# EAGLE board IOB-I2C-MAX731x_array (EAGLE 7.7.0)
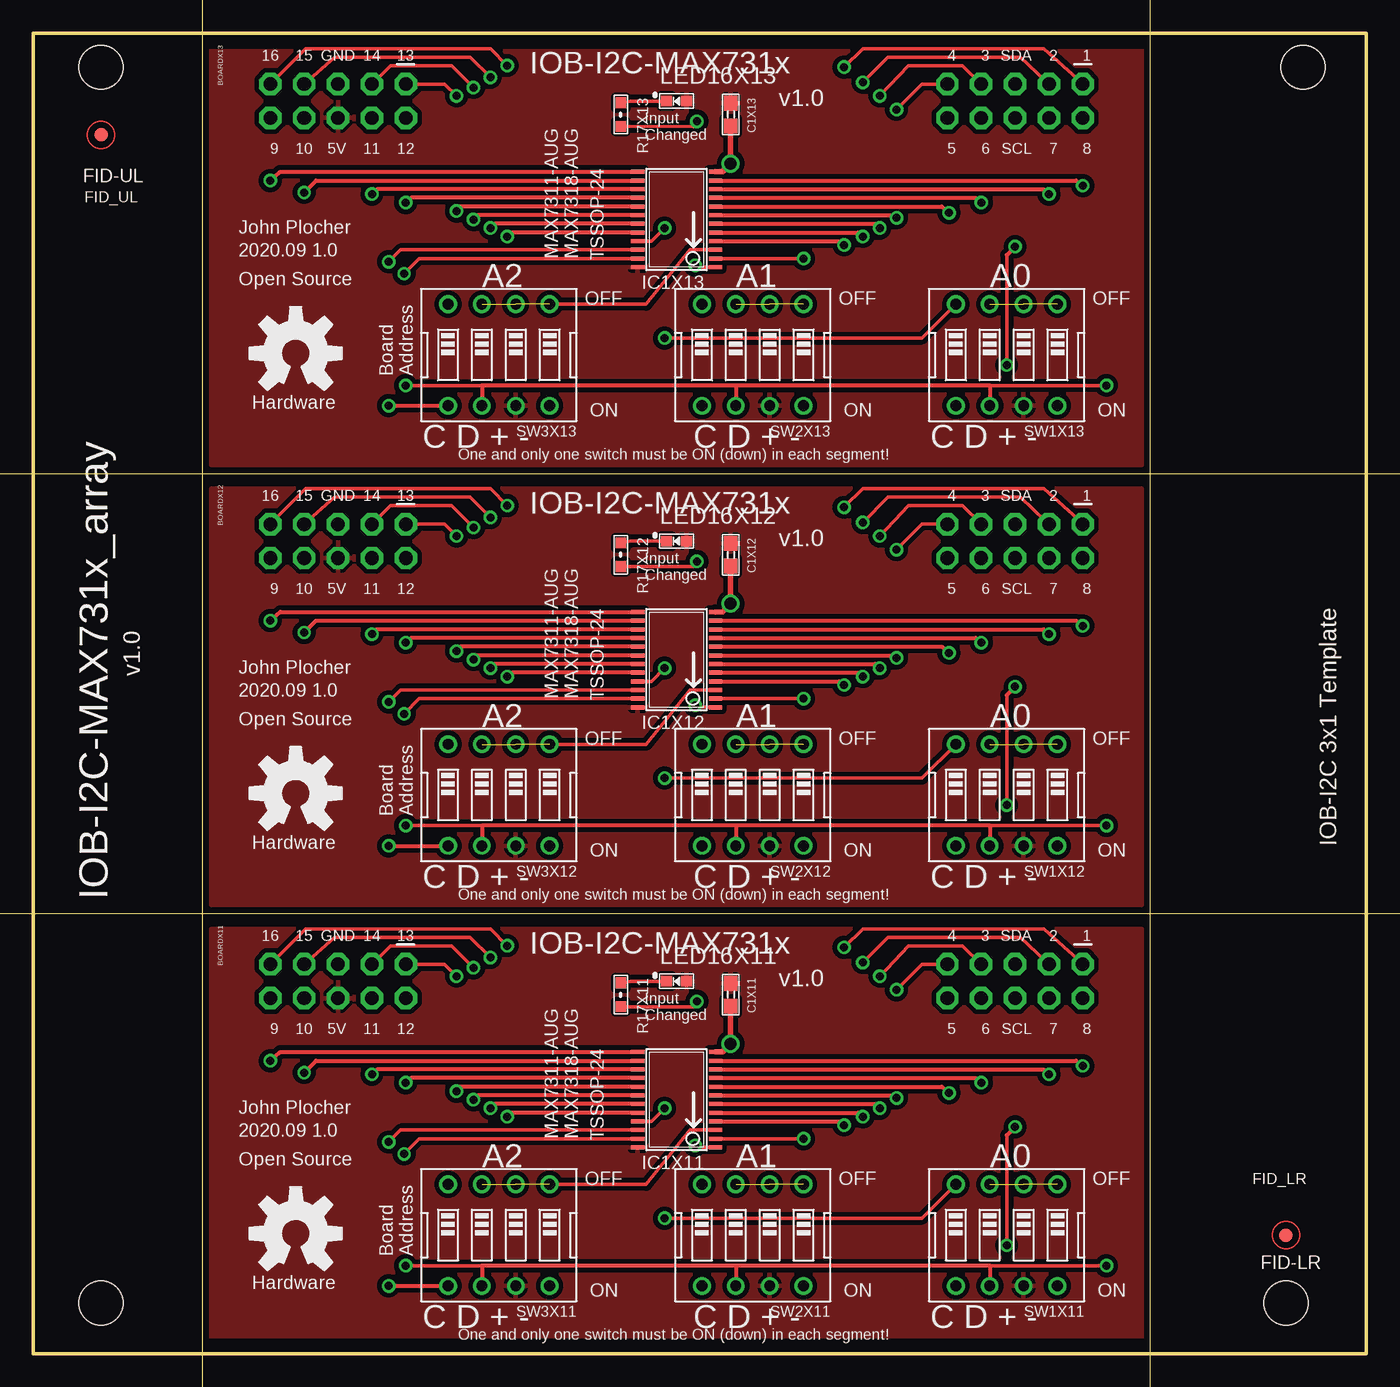
[diagram p0: board, top side]
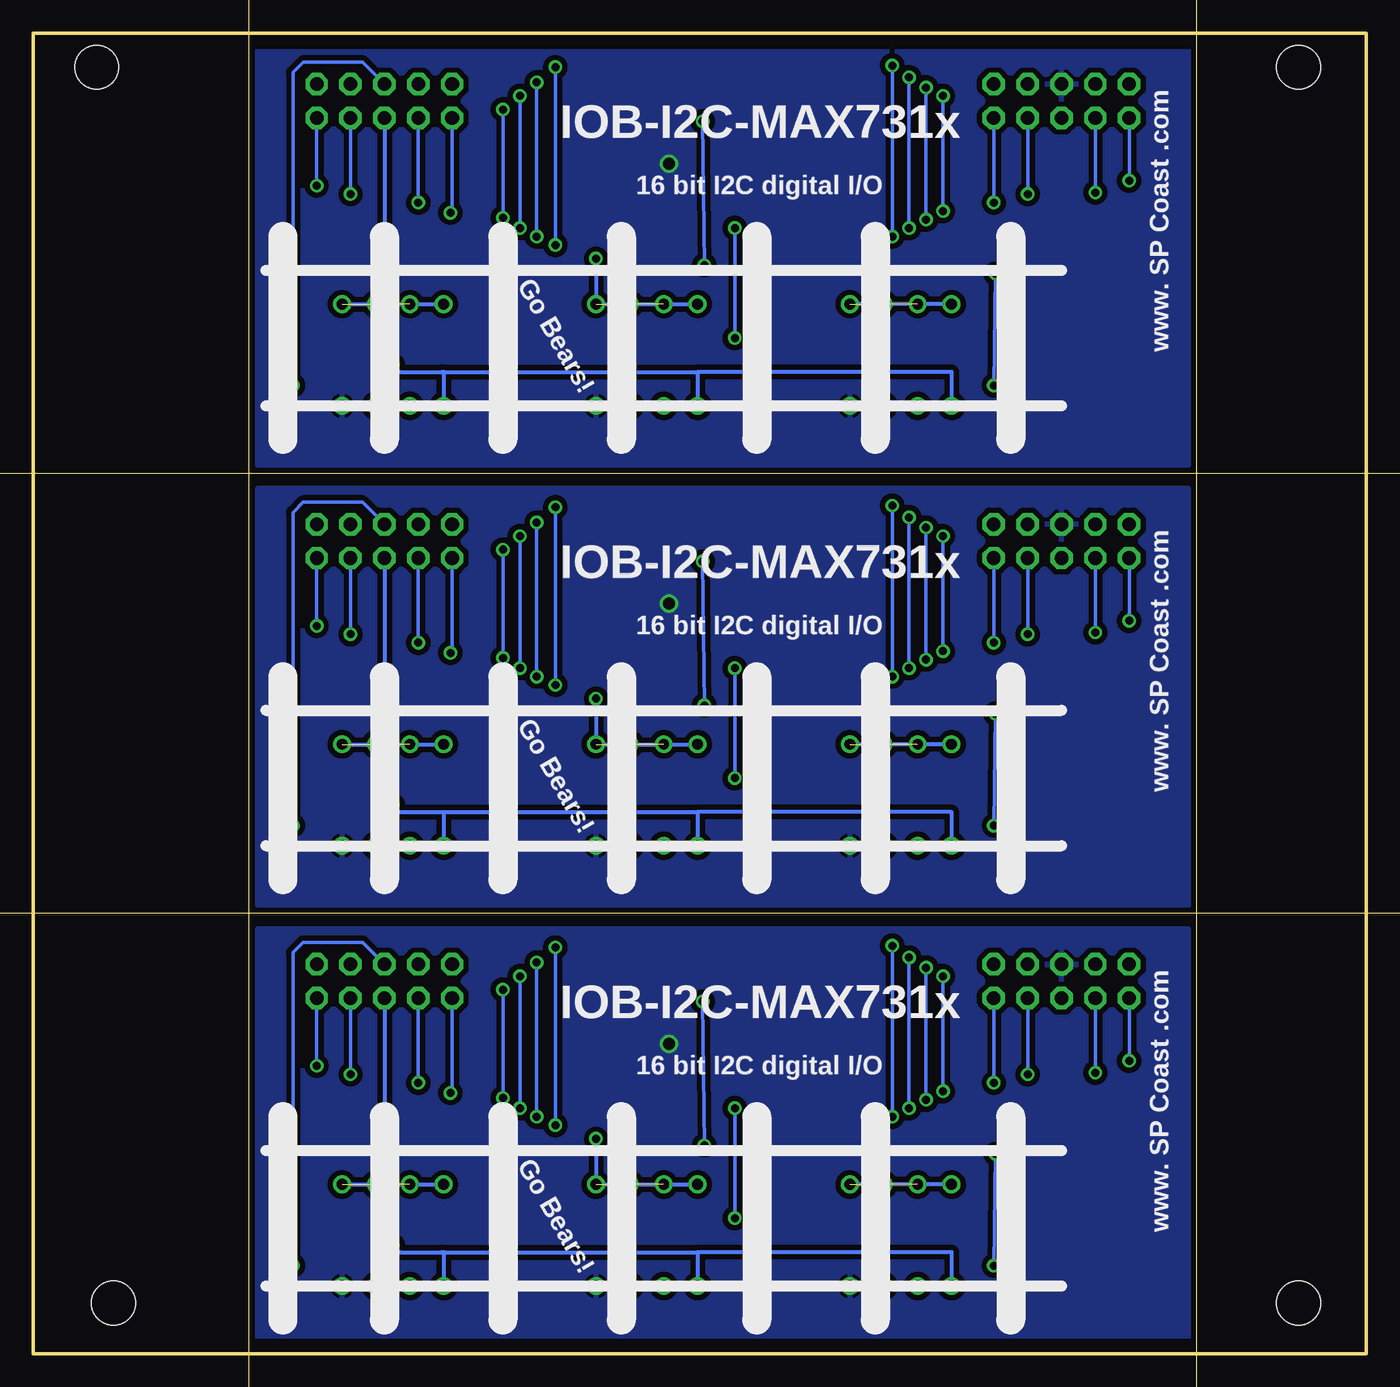
[diagram p1: board, bottom side, seen from below]

Size 100 x 99.06 mm. Coordinates in mm from the lower left corner, seen from the top.
Copper layers (1*16): Top 0.035mm / dielectric 1.5mm / Bottom 0.035mm
Design rules "default": minimum track width 10mil, minimum drill 0.6mm, track to track 8mil, track to pad 8mil, pad to pad 8mil, via to via 8mil, smd to smd 8mil, copper to edge 40mil, drill to drill 8mil, minimum pad ring 10mil, minimum via ring 8mil, stop-mask expansion 4mil, vias tented up to drill 0mil, thermal gap 10mil

## Footprints (pad centres in the part's own frame; a part is rotated, then mirrored left to right if it is on the bottom)
I2C-EXPANDER = drill 1.016 pad 1.676 octagon: 1 30.48,1.27; 2 27.94,1.27; 3 22.86,1.27; 4 20.32,1.27; 5 20.32,-1.27; 6 22.86,-1.27; 7 27.94,-1.27; 8 30.48,-1.27; 9 -30.48,-1.27; 10 -27.94,-1.27; 11 -22.86,-1.27; 12 -20.32,-1.27; 13 -20.32,1.27; 14 -22.86,1.27; 15 -27.94,1.27; 16 -30.48,1.27; GND -25.4,1.27; SCL 25.4,-1.27; SDA 25.4,1.27; VCC -25.4,-1.27
0603-CAP = smd 1.1 x 1: 1 -0.85,0; 2 0.85,0
FIDUCIAL_1MM = smd 1 x 1: 1 0,0
TSSOP24 = smd 0.305 x 0.991: 1 -3.575,-2.918; 2 -2.925,-2.918; 3 -2.275,-2.918; 4 -1.625,-2.918; 5 -0.975,-2.918; 6 -0.325,-2.918; 7 0.325,-2.918; 8 0.975,-2.918; 9 1.625,-2.918; 10 2.275,-2.918; 11 2.925,-2.918; 12 3.575,-2.918; 13 3.575,2.918; 14 2.925,2.918; 15 2.275,2.918; 16 1.625,2.918; 17 0.975,2.918; 18 0.325,2.918; 19 -0.325,2.918; 20 -0.975,2.918; 21 -1.625,2.918; 22 -2.275,2.918; 23 -2.925,2.918; 24 -3.575,2.918
0603-LED = smd 0.8 x 0.8: A 0.75,0; C -0.75,0
0603-RES = smd 0.813 x 0.813: 1 -0.889,0; 2 0.889,0
EDG-04 = drill 0.813: 1 -3.81,-3.81; 2 -1.27,-3.81; 3 1.27,-3.81; 4 3.81,-3.81; 5 3.81,3.81; 6 1.27,3.81; 7 -1.27,3.81; 8 -3.81,3.81
BOARD-TEMPLATE-IOB-I2C-3X1-ARRAY = hole 3.3: 5.08,96.52; 95.25,96.52; 93.98,3.81; 5.08,3.81

## Placement (x,y rotation side)
BOARDX11  CONNECTOR-I2C-EXPANDER  [I2C-EXPANDER]  48.26,27.94 0 top
BOARDX12  CONNECTOR-I2C-EXPANDER  [I2C-EXPANDER]  48.26,60.96 0 top
BOARDX13  CONNECTOR-I2C-EXPANDER  [I2C-EXPANDER]  48.26,93.98 0 top
C1X11  0.1uF  [0603-CAP]  52.32,26.92 270 top
C1X12  0.1uF  [0603-CAP]  52.32,59.94 270 top
C1X13  0.1uF  [0603-CAP]  52.32,92.96 270 top
FID-LR  FIDUCIAL  [FIDUCIAL_1MM]  93.98,8.89 0 top
FID-UL  FIDUCIAL  [FIDUCIAL_1MM]  5.08,91.44 0 top
IC1X11  MAX7311  [TSSOP24]  48.26,19.05 90 top
IC1X12  MAX7311  [TSSOP24]  48.26,52.07 90 top
IC1X13  MAX7311  [TSSOP24]  48.26,85.09 90 top
LED16X11  G  [0603-LED]  48.26,27.94 0 top
LED16X12  G  [0603-LED]  48.26,60.96 0 top
LED16X13  G  [0603-LED]  48.26,93.98 0 top
R17X11  4k7  [0603-RES]  44.07,26.92 270 top
R17X12  4k7  [0603-RES]  44.07,59.94 270 top
R17X13  4k7  [0603-RES]  44.07,92.96 270 top
SW1X11  SPSTx4  [EDG-04]  73.03,8.89 180 top
SW1X12  SPSTx4  [EDG-04]  73.03,41.91 180 top
SW1X13  SPSTx4  [EDG-04]  73.03,74.93 180 top
SW2X11  SPSTx4  [EDG-04]  53.98,8.89 180 top
SW2X12  SPSTx4  [EDG-04]  53.98,41.91 180 top
SW2X13  SPSTx4  [EDG-04]  53.98,74.93 180 top
SW3X11  SPSTx4  [EDG-04]  34.92,8.89 180 top
SW3X12  SPSTx4  [EDG-04]  34.92,41.91 180 top
SW3X13  SPSTx4  [EDG-04]  34.92,74.93 180 top
U$1X11  DOC-OSHW-LOGO-L  [OSHW-LOGO-L]  19.68,9.02 0 top
U$1X12  DOC-OSHW-LOGO-L  [OSHW-LOGO-L]  19.68,42.04 0 top
U$1X13  DOC-OSHW-LOGO-L  [OSHW-LOGO-L]  19.68,75.06 0 top
U$5X1  BOARD  [BOARD-TEMPLATE-IOB-I2C-3X1-ARRAY]  0,0 0 top

## Library data of the parts
BOARDX11-BOARDX13 C1X11-C1X13 FID-LR FID-UL IC1X11-IC1X13 LED16X11-LED16X13 R17X11-R17X13 SW1X11-SW1X13 SW2X11-SW2X13 SW3X11-SW3X13 U$1X11-U$1X13 U$5X1 = SPCoast

## Nets
!INTX11: IC1X11.1 R17X11.2
!INTX12: IC1X12.1 R17X12.2
!INTX13: IC1X13.1 R17X13.2
A0X11: IC1X11.21 SW1X11.1 SW1X11.2 SW1X11.3 SW1X11.4
A0X12: IC1X12.21 SW1X12.1 SW1X12.2 SW1X12.3 SW1X12.4
A0X13: IC1X13.21 SW1X13.1 SW1X13.2 SW1X13.3 SW1X13.4
A1X11: IC1X11.2 SW2X11.1 SW2X11.2 SW2X11.3 SW2X11.4
A1X12: IC1X12.2 SW2X12.1 SW2X12.2 SW2X12.3 SW2X12.4
A1X13: IC1X13.2 SW2X13.1 SW2X13.2 SW2X13.3 SW2X13.4
A2X11: IC1X11.3 SW3X11.1 SW3X11.2 SW3X11.3 SW3X11.4
A2X12: IC1X12.3 SW3X12.1 SW3X12.2 SW3X12.3 SW3X12.4
A2X13: IC1X13.3 SW3X13.1 SW3X13.2 SW3X13.3 SW3X13.4
GNDX11: BOARDX11.GND C1X11.2 IC1X11.12 SW1X11.8 SW2X11.8 SW3X11.8
GNDX12: BOARDX12.GND C1X12.2 IC1X12.12 SW1X12.8 SW2X12.8 SW3X12.8
GNDX13: BOARDX13.GND C1X13.2 IC1X13.12 SW1X13.8 SW2X13.8 SW3X13.8
N$38X11: LED16X11.C R17X11.1
N$38X12: LED16X12.C R17X12.1
N$38X13: LED16X13.C R17X13.1
P1X11: BOARDX11.1 IC1X11.4
P1X12: BOARDX12.1 IC1X12.4
P1X13: BOARDX13.1 IC1X13.4
P2X11: BOARDX11.2 IC1X11.5
P2X12: BOARDX12.2 IC1X12.5
P2X13: BOARDX13.2 IC1X13.5
P3X11: BOARDX11.3 IC1X11.6
P3X12: BOARDX12.3 IC1X12.6
P3X13: BOARDX13.3 IC1X13.6
P4X11: BOARDX11.4 IC1X11.7
P4X12: BOARDX12.4 IC1X12.7
P4X13: BOARDX13.4 IC1X13.7
P5X11: BOARDX11.5 IC1X11.8
P5X12: BOARDX12.5 IC1X12.8
P5X13: BOARDX13.5 IC1X13.8
P6X11: BOARDX11.6 IC1X11.9
P6X12: BOARDX12.6 IC1X12.9
P6X13: BOARDX13.6 IC1X13.9
P7X11: BOARDX11.7 IC1X11.10
P7X12: BOARDX12.7 IC1X12.10
P7X13: BOARDX13.7 IC1X13.10
P8X11: BOARDX11.8 IC1X11.11
P8X12: BOARDX12.8 IC1X12.11
P8X13: BOARDX13.8 IC1X13.11
P9X11: BOARDX11.9 IC1X11.13
P9X12: BOARDX12.9 IC1X12.13
P9X13: BOARDX13.9 IC1X13.13
P10X11: BOARDX11.10 IC1X11.14
P10X12: BOARDX12.10 IC1X12.14
P10X13: BOARDX13.10 IC1X13.14
P11X11: BOARDX11.11 IC1X11.15
P11X12: BOARDX12.11 IC1X12.15
P11X13: BOARDX13.11 IC1X13.15
P12X11: BOARDX11.12 IC1X11.16
P12X12: BOARDX12.12 IC1X12.16
P12X13: BOARDX13.12 IC1X13.16
P13X11: BOARDX11.13 IC1X11.17
P13X12: BOARDX12.13 IC1X12.17
P13X13: BOARDX13.13 IC1X13.17
P14X11: BOARDX11.14 IC1X11.18
P14X12: BOARDX12.14 IC1X12.18
P14X13: BOARDX13.14 IC1X13.18
P15X11: BOARDX11.15 IC1X11.19
P15X12: BOARDX12.15 IC1X12.19
P15X13: BOARDX13.15 IC1X13.19
P16X11: BOARDX11.16 IC1X11.20
P16X12: BOARDX12.16 IC1X12.20
P16X13: BOARDX13.16 IC1X13.20
SCLX11: BOARDX11.SCL IC1X11.22 SW1X11.5 SW2X11.5 SW3X11.5
SCLX12: BOARDX12.SCL IC1X12.22 SW1X12.5 SW2X12.5 SW3X12.5
SCLX13: BOARDX13.SCL IC1X13.22 SW1X13.5 SW2X13.5 SW3X13.5
SDAX11: BOARDX11.SDA IC1X11.23 SW1X11.6 SW2X11.6 SW3X11.6
SDAX12: BOARDX12.SDA IC1X12.23 SW1X12.6 SW2X12.6 SW3X12.6
SDAX13: BOARDX13.SDA IC1X13.23 SW1X13.6 SW2X13.6 SW3X13.6
VCCX11: BOARDX11.VCC C1X11.1 IC1X11.24 LED16X11.A SW1X11.7 SW2X11.7 SW3X11.7
VCCX12: BOARDX12.VCC C1X12.1 IC1X12.24 LED16X12.A SW1X12.7 SW2X12.7 SW3X12.7
VCCX13: BOARDX13.VCC C1X13.1 IC1X13.24 LED16X13.A SW1X13.7 SW2X13.7 SW3X13.7

## Tracks (layer width: path | path; a pad name or v marks a point on that pad's centre or on a via)
!INTX11  (via drill 0.6 pad 0.9)
  Top 0.254: v49.66,15.62 50.04,15.49 51.2,15.49 IC1X11.1 | R17X11.2 49.54,26.02 v49.78,26.42
  Bottom 0.254: v49.78,26.42 v49.66,15.62
!INTX12  (via drill 0.6 pad 0.9)
  Top 0.254: v49.66,48.64 50.04,48.51 51.2,48.51 IC1X12.1 | R17X12.2 49.54,59.04 v49.78,59.44
  Bottom 0.254: v49.78,59.44 v49.66,48.64
!INTX13  (via drill 0.6 pad 0.9)
  Top 0.254: v49.66,81.66 50.04,81.53 51.2,81.53 IC1X13.1 | R17X13.2 49.54,92.06 v49.78,92.46
  Bottom 0.254: v49.78,92.46 v49.66,81.66
A0X11  (via drill 0.6 pad 0.9)  (2 unrouted)
  Top 0.254: SW1X11.4 66.67,10.16 v47.37,10.16 | IC1X11.21 46.38,17.43 v47.37,18.41
  Bottom 0.254: v47.37,18.41 v47.37,10.16
  Bottom 0.305: SW1X11.1 SW1X11.4
A0X12  (via drill 0.6 pad 0.9)  (2 unrouted)
  Top 0.254: SW1X12.4 66.67,43.18 v47.37,43.18 | IC1X12.21 46.38,50.45 v47.37,51.44
  Bottom 0.254: v47.37,51.44 v47.37,43.18
  Bottom 0.305: SW1X12.1 SW1X12.4
A0X13  (via drill 0.6 pad 0.9)  (2 unrouted)
  Top 0.254: SW1X13.4 66.67,76.2 v47.37,76.2 | IC1X13.21 46.38,83.47 v47.37,84.45
  Bottom 0.254: v47.37,84.45 v47.37,76.2
  Bottom 0.305: SW1X13.1 SW1X13.4
A1X11  (via drill 0.6 pad 0.9)  (2 unrouted)
  Top 0.254: IC1X11.2 57.4,16.12 v57.78,16.12
  Top 0.305: 49.76,12.7 SW2X11.4
  Bottom 0.305: SW2X11.4 SW2X11.1 v57.78,16.12
A1X12  (via drill 0.6 pad 0.9)  (2 unrouted)
  Top 0.254: IC1X12.2 57.4,49.15 v57.78,49.14
  Top 0.305: 49.76,45.72 SW2X12.4
  Bottom 0.305: SW2X12.4 SW2X12.1 v57.78,49.14
A1X13  (via drill 0.6 pad 0.9)  (2 unrouted)
  Top 0.254: IC1X13.2 57.4,82.17 v57.78,82.16
  Top 0.305: 49.76,78.74 SW2X13.4
  Bottom 0.305: SW2X13.4 SW2X13.1 v57.78,82.16
A2X11  (2 unrouted)
  Top 0.254: IC1X11.3 49.29,16.77 45.97,12.7 SW3X11.1
  Bottom 0.305: SW3X11.4 SW3X11.1
A2X12  (2 unrouted)
  Top 0.254: IC1X12.3 49.29,49.8 45.97,45.72 SW3X12.1
  Bottom 0.305: SW3X12.4 SW3X12.1
A2X13  (2 unrouted)
  Top 0.254: IC1X13.3 49.29,82.81 45.97,78.74 SW3X13.1
  Bottom 0.305: SW3X13.4 SW3X13.1
GNDX11  (via drill 0.9 pad 1.35)
  Top 0.406: IC1X11.12 51.71,22.62 v52.32,23.24 C1X11.2
  pour Bottom (isolate 0.406, rank 2): 83.19,0.64 83.19,31.88 13.34,31.88 13.34,0.64
GNDX12  (via drill 0.9 pad 1.35)
  Top 0.406: IC1X12.12 51.71,55.65 v52.32,56.26 C1X12.2
  pour Bottom (isolate 0.406, rank 2): 83.19,33.66 83.19,64.9 13.34,64.9 13.34,33.66
GNDX13  (via drill 0.9 pad 1.35)
  Top 0.406: IC1X13.12 51.71,88.67 v52.32,89.28 C1X13.2
  pour Bottom (isolate 0.406, rank 2): 83.19,66.67 83.19,97.92 13.34,97.92 13.34,66.67
N$38X11
  Top 0.254: LED16X11.C 44.82,27.94 R17X11.1
N$38X12
  Top 0.254: LED16X12.C 44.82,60.96 R17X12.1
N$38X13
  Top 0.254: LED16X13.C 44.82,93.98 R17X13.1
P1X11  (via drill 0.6 pad 0.9)
  Top 0.254: v60.83,30.48 62.23,31.88 75.82,31.88 78.36,29.59 BOARDX11.1
  Top 0.305: IC1X11.4 60.48,17.43 v60.83,17.14
  Bottom 0.254: v60.83,17.14 v60.83,30.48
P1X12  (via drill 0.6 pad 0.9)
  Top 0.254: v60.83,63.5 62.23,64.9 75.82,64.9 78.36,62.61 BOARDX12.1
  Top 0.305: IC1X12.4 60.48,50.45 v60.83,50.16
  Bottom 0.254: v60.83,50.16 v60.83,63.5
P1X13  (via drill 0.6 pad 0.9)
  Top 0.254: v60.83,96.52 62.23,97.92 75.82,97.92 78.36,95.63 BOARDX13.1
  Top 0.305: IC1X13.4 60.48,83.47 v60.83,83.19
  Bottom 0.254: v60.83,83.19 v60.83,96.52
P2X11  (via drill 0.6 pad 0.9)
  Top 0.254: v62.23,29.34 64.14,31.24 74.04,31.24 75.95,29.46 BOARDX11.2
  Top 0.305: IC1X11.5 61.89,18.07 v62.23,17.78
  Bottom 0.254: v62.23,17.78 v62.23,29.34
P2X12  (via drill 0.6 pad 0.9)
  Top 0.254: v62.23,62.36 64.14,64.26 74.04,64.26 75.95,62.48 BOARDX12.2
  Top 0.305: IC1X12.5 61.89,51.09 v62.23,50.8
  Bottom 0.254: v62.23,50.8 v62.23,62.36
P2X13  (via drill 0.6 pad 0.9)
  Top 0.254: v62.23,95.38 64.14,97.28 74.04,97.28 75.95,95.5 BOARDX13.2
  Top 0.305: IC1X13.5 61.89,84.11 v62.23,83.82
  Bottom 0.254: v62.23,83.82 v62.23,95.38
P3X11  (via drill 0.6 pad 0.9)
  Top 0.254: v63.5,28.32 65.66,30.61 69.72,30.61 BOARDX11.3
  Top 0.305: IC1X11.6 63.17,18.73 v63.5,18.41
  Bottom 0.254: v63.5,18.41 v63.5,28.32
P3X12  (via drill 0.6 pad 0.9)
  Top 0.254: v63.5,61.34 65.66,63.63 69.72,63.63 BOARDX12.3
  Top 0.305: IC1X12.6 63.17,51.74 v63.5,51.44
  Bottom 0.254: v63.5,51.44 v63.5,61.34
P3X13  (via drill 0.6 pad 0.9)
  Top 0.254: v63.5,94.36 65.66,96.65 69.72,96.65 BOARDX13.3
  Top 0.305: IC1X13.6 63.17,84.77 v63.5,84.45
  Bottom 0.254: v63.5,84.45 v63.5,94.36
P4X11  (via drill 0.6 pad 0.9)
  Top 0.254: BOARDX11.4 66.67,29.21 v64.77,27.3
  Top 0.305: IC1X11.7 64.46,19.38 v64.77,19.18
  Bottom 0.254: v64.77,27.3 v64.77,19.18
P4X12  (via drill 0.6 pad 0.9)
  Top 0.254: BOARDX12.4 66.67,62.23 v64.77,60.33
  Top 0.305: IC1X12.7 64.46,52.4 v64.77,52.2
  Bottom 0.254: v64.77,60.33 v64.77,52.2
P4X13  (via drill 0.6 pad 0.9)
  Top 0.254: BOARDX13.4 66.67,95.25 v64.77,93.34
  Top 0.305: IC1X13.7 64.46,85.42 v64.77,85.22
  Bottom 0.254: v64.77,93.34 v64.77,85.22
P5X11  (via drill 0.6 pad 0.9)
  Top 0.305: IC1X11.8 68.16,20.02 v68.71,19.56
  Bottom 0.254: BOARDX11.5 68.58,19.56 v68.71,19.56
P5X12  (via drill 0.6 pad 0.9)
  Top 0.305: IC1X12.8 68.16,53.05 v68.71,52.58
  Bottom 0.254: BOARDX12.5 68.58,52.58 v68.71,52.58
P5X13  (via drill 0.6 pad 0.9)
  Top 0.305: IC1X13.8 68.16,86.06 v68.71,85.6
  Bottom 0.254: BOARDX13.5 68.58,85.6 v68.71,85.6
P6X11  (via drill 0.6 pad 0.9)
  Top 0.305: IC1X11.9 70.71,20.68 v71.12,20.32
  Bottom 0.254: BOARDX11.6 v71.12,20.32
P6X12  (via drill 0.6 pad 0.9)
  Top 0.305: IC1X12.9 70.71,53.7 v71.12,53.34
  Bottom 0.254: BOARDX12.6 v71.12,53.34
P6X13  (via drill 0.6 pad 0.9)
  Top 0.305: IC1X13.9 70.71,86.72 v71.12,86.36
  Bottom 0.254: BOARDX13.6 v71.12,86.36
P7X11  (via drill 0.6 pad 0.9)
  Top 0.305: IC1X11.10 75.81,21.32 v76.2,20.95
  Bottom 0.254: BOARDX11.7 v76.2,20.95
P7X12  (via drill 0.6 pad 0.9)
  Top 0.305: IC1X12.10 75.81,54.34 v76.2,53.98
  Bottom 0.254: BOARDX12.7 v76.2,53.98
P7X13  (via drill 0.6 pad 0.9)
  Top 0.305: IC1X13.10 75.81,87.36 v76.2,87
  Bottom 0.254: BOARDX13.7 v76.2,87
P8X11  (via drill 0.6 pad 0.9)
  Top 0.305: IC1X11.11 78.24,21.98 v78.74,21.59
  Bottom 0.254: BOARDX11.8 v78.74,21.59
P8X12  (via drill 0.6 pad 0.9)
  Top 0.305: IC1X12.11 78.24,54.99 v78.74,54.61
  Bottom 0.254: BOARDX12.8 v78.74,54.61
P8X13  (via drill 0.6 pad 0.9)
  Top 0.305: IC1X13.11 78.24,88.02 v78.74,87.63
  Bottom 0.254: BOARDX13.8 v78.74,87.63
P9X11  (via drill 0.6 pad 0.9)
  Top 0.305: v17.78,21.97 18.52,22.62 IC1X11.13
  Bottom 0.254: BOARDX11.9 v17.78,21.97
P9X12  (via drill 0.6 pad 0.9)
  Top 0.305: v17.78,54.99 18.52,55.65 IC1X12.13
  Bottom 0.254: BOARDX12.9 v17.78,54.99
P9X13  (via drill 0.6 pad 0.9)
  Top 0.305: v17.78,88.01 18.52,88.67 IC1X13.13
  Bottom 0.254: BOARDX13.9 v17.78,88.01
P10X11  (via drill 0.6 pad 0.9)
  Top 0.305: v20.32,21.08 21.21,21.97 IC1X11.14
  Bottom 0.254: BOARDX11.10 v20.32,21.08
P10X12  (via drill 0.6 pad 0.9)
  Top 0.305: v20.32,54.1 21.21,54.99 IC1X12.14
  Bottom 0.254: BOARDX12.10 v20.32,54.1
P10X13  (via drill 0.6 pad 0.9)
  Top 0.305: v20.32,87.12 21.21,88.01 IC1X13.14
  Bottom 0.254: BOARDX13.10 v20.32,87.12
P11X11  (via drill 0.6 pad 0.9)
  Top 0.305: IC1X11.15 25.79,21.32 v25.4,20.95
  Bottom 0.254: BOARDX11.11 v25.4,20.95
P11X12  (via drill 0.6 pad 0.9)
  Top 0.305: IC1X12.15 25.79,54.34 v25.4,53.98
  Bottom 0.254: BOARDX12.11 v25.4,53.98
P11X13  (via drill 0.6 pad 0.9)
  Top 0.305: IC1X13.15 25.79,87.36 v25.4,87
  Bottom 0.254: BOARDX13.11 v25.4,87
P12X11  (via drill 0.6 pad 0.9)
  Top 0.305: IC1X11.16 28.35,20.68 v27.94,20.32
  Bottom 0.254: BOARDX11.12 v27.94,20.32
P12X12  (via drill 0.6 pad 0.9)
  Top 0.305: IC1X12.16 28.35,53.7 v27.94,53.34
  Bottom 0.254: BOARDX12.12 v27.94,53.34
P12X13  (via drill 0.6 pad 0.9)
  Top 0.305: IC1X13.16 28.35,86.72 v27.94,86.36
  Bottom 0.254: BOARDX13.12 v27.94,86.36
P13X11  (via drill 0.6 pad 0.9)
  Top 0.254: BOARDX11.13 30.86,29.21 v31.75,28.32
  Top 0.305: IC1X11.17 32.05,20.02 v31.75,19.68
  Bottom 0.254: v31.75,28.32 v31.75,19.68
P13X12  (via drill 0.6 pad 0.9)
  Top 0.254: BOARDX12.13 30.86,62.23 v31.75,61.34
  Top 0.305: IC1X12.17 32.05,53.05 v31.75,52.7
  Bottom 0.254: v31.75,61.34 v31.75,52.7
P13X13  (via drill 0.6 pad 0.9)
  Top 0.254: BOARDX13.13 30.86,95.25 v31.75,94.36
  Top 0.305: IC1X13.17 32.05,86.06 v31.75,85.72
  Bottom 0.254: v31.75,94.36 v31.75,85.72
P14X11  (via drill 0.6 pad 0.9)
  Top 0.254: BOARDX11.14 26.8,30.61 31.37,30.61 v33.02,28.96
  Top 0.305: IC1X11.18 33.33,19.38 v33.02,19.05
  Bottom 0.254: v33.02,28.96 v33.02,19.05
P14X12  (via drill 0.6 pad 0.9)
  Top 0.254: BOARDX12.14 26.8,63.63 31.37,63.63 v33.02,61.98
  Top 0.305: IC1X12.18 33.33,52.4 v33.02,52.07
  Bottom 0.254: v33.02,61.98 v33.02,52.07
P14X13  (via drill 0.6 pad 0.9)
  Top 0.254: BOARDX13.14 26.8,96.65 31.37,96.65 v33.02,95
  Top 0.305: IC1X13.18 33.33,85.42 v33.02,85.09
  Bottom 0.254: v33.02,95 v33.02,85.09
P15X11  (via drill 0.6 pad 0.9)
  Top 0.254: BOARDX11.15 22.61,31.24 32.77,31.24 v34.29,29.72
  Top 0.305: IC1X11.19 34.62,18.73 v34.29,18.41
  Bottom 0.254: v34.29,29.72 v34.29,18.41
P15X12  (via drill 0.6 pad 0.9)
  Top 0.254: BOARDX12.15 22.61,64.26 32.77,64.26 v34.29,62.74
  Top 0.305: IC1X12.19 34.62,51.74 v34.29,51.44
  Bottom 0.254: v34.29,62.74 v34.29,51.44
P15X13  (via drill 0.6 pad 0.9)
  Top 0.254: BOARDX13.15 22.61,97.28 32.77,97.28 v34.29,95.76
  Top 0.305: IC1X13.19 34.62,84.77 v34.29,84.45
  Bottom 0.254: v34.29,95.76 v34.29,84.45
P16X11  (via drill 0.6 pad 0.9)
  Top 0.254: BOARDX11.16 20.45,31.88 34.29,31.88 v35.56,30.61
  Top 0.305: IC1X11.20 35.9,18.07 v35.56,17.78
  Bottom 0.254: v35.56,30.61 v35.56,17.78
P16X12  (via drill 0.6 pad 0.9)
  Top 0.254: BOARDX12.16 20.45,64.9 34.29,64.9 v35.56,63.63
  Top 0.305: IC1X12.20 35.9,51.09 v35.56,50.8
  Bottom 0.254: v35.56,63.63 v35.56,50.8
P16X13  (via drill 0.6 pad 0.9)
  Top 0.254: BOARDX13.16 20.45,97.92 34.29,97.92 v35.56,96.65
  Top 0.305: IC1X13.20 35.9,84.11 v35.56,83.82
  Bottom 0.254: v35.56,96.65 v35.56,83.82
SCLX11  (via drill 0.6 pad 0.9)
  Top 0.254: IC1X11.22 27.57,16.77 v26.67,15.88 | 73.03,16.38 v73.03,8.13
  Top 0.305: v26.67,5.08 SW3X11.5 | v73.66,17.02 73.03,16.38
  Bottom 0.254: 69.34,7.62 69.22,7.49
  Bottom 0.305: SW3X11.5 31.11,7.62 50.16,7.62 | 50.16,7.62 SW2X11.5 | 50.16,7.62 69.22,7.62 69.22,7.49 SW1X11.5 | v26.67,15.88 v26.67,5.08 | BOARDX11.SCL v73.66,17.02 | v73.03,8.13 72.52,7.62 69.34,7.62
SCLX12  (via drill 0.6 pad 0.9)
  Top 0.254: IC1X12.22 27.57,49.8 v26.67,48.9 | 73.03,49.4 v73.03,41.15
  Top 0.305: v26.67,38.1 SW3X12.5 | v73.66,50.04 73.03,49.4
  Bottom 0.254: 69.34,40.64 69.22,40.51
  Bottom 0.305: SW3X12.5 31.11,40.64 50.16,40.64 | 50.16,40.64 SW2X12.5 | 50.16,40.64 69.22,40.64 69.22,40.51 SW1X12.5 | v26.67,48.9 v26.67,38.1 | BOARDX12.SCL v73.66,50.04 | v73.03,41.15 72.52,40.64 69.34,40.64
SCLX13  (via drill 0.6 pad 0.9)
  Top 0.254: IC1X13.22 27.57,82.81 v26.67,81.92 | 73.03,82.42 v73.03,74.17
  Top 0.305: v26.67,71.12 SW3X13.5 | v73.66,83.06 73.03,82.42
  Bottom 0.254: 69.34,73.66 69.22,73.53
  Bottom 0.305: SW3X13.5 31.11,73.66 50.16,73.66 | 50.16,73.66 SW2X13.5 | 50.16,73.66 69.22,73.66 69.22,73.53 SW1X13.5 | v26.67,81.92 v26.67,71.12 | BOARDX13.SCL v73.66,83.06 | v73.03,74.17 72.52,73.66 69.34,73.66
SDAX11  (via drill 0.6 pad 0.9)
  Top 0.254: IC1X11.23 28.96,16.13 v27.82,14.99 | v27.94,6.6 33.66,6.6 | v80.52,6.6 71.75,6.6
  Top 0.305: SW3X11.6 33.66,6.6 52.7,6.6 | 52.7,6.6 SW2X11.6 | SW1X11.6 71.75,6.6 52.7,6.6
  Bottom 0.254: v27.82,14.99 v27.94,6.6 | BOARDX11.SDA 75.31,30.86 79.76,30.86 80.52,30.1 v80.52,6.6
SDAX12  (via drill 0.6 pad 0.9)
  Top 0.254: IC1X12.23 28.96,49.15 v27.82,48.01 | v27.94,39.62 33.66,39.62 | v80.52,39.62 71.75,39.62
  Top 0.305: SW3X12.6 33.66,39.62 52.7,39.62 | 52.7,39.62 SW2X12.6 | SW1X12.6 71.75,39.62 52.7,39.62
  Bottom 0.254: v27.82,48.01 v27.94,39.62 | BOARDX12.SDA 75.31,63.88 79.76,63.88 80.52,63.12 v80.52,39.62
SDAX13  (via drill 0.6 pad 0.9)
  Top 0.254: IC1X13.23 28.96,82.17 v27.82,81.03 | v27.94,72.64 33.66,72.64 | v80.52,72.64 71.75,72.64
  Top 0.305: SW3X13.6 33.66,72.64 52.7,72.64 | 52.7,72.64 SW2X13.6 | SW1X13.6 71.75,72.64 52.7,72.64
  Bottom 0.254: v27.82,81.03 v27.94,72.64 | BOARDX13.SDA 75.31,96.9 79.76,96.9 80.52,96.14 v80.52,72.64
VCCX11
  pour Top (isolate 0.356, rank 2): 83.19,0.64 83.19,31.88 13.34,31.88 13.34,0.64
VCCX12
  pour Top (isolate 0.356, rank 2): 83.19,33.66 83.19,64.9 13.34,64.9 13.34,33.66
VCCX13
  pour Top (isolate 0.356, rank 2): 83.19,66.67 83.19,97.92 13.34,97.92 13.34,66.67

## Text on the board
tPlace: IOB-I2C-MAX731x | v1.0 | Input / Changed | John Plocher | 2020.09 1.0 | MAX7311-AUG / MAX7318-AUG | TSSOP-24 | Open Source | A2 | A1 | A0 | OFF | OFF | OFF | Board / Address | Hardware | ON | ON | ON | C D + - | C D + - | C D + - | One and only one switch must be ON (down) in each segment! | IOB-I2C-MAX731x | v1.0 | Input / Changed | v1.0 | John Plocher | 2020.09 1.0 | MAX7311-AUG / MAX7318-AUG | TSSOP-24 | Open Source | A2 | A1 | A0 | OFF | OFF | OFF | Board / Address | Hardware | ON | ON | ON | C D + - | C D + - | C D + - | One and only one switch must be ON (down) in each segment! | IOB-I2C-MAX731x | v1.0 | Input / Changed | John Plocher | 2020.09 1.0 | MAX7311-AUG / MAX7318-AUG | TSSOP-24 | Open Source | A2 | A1 | A0 | OFF | OFF | OFF | Board / Address | Hardware | ON | ON | ON | C D + - | C D + - | C D + - | One and only one switch must be ON (down) in each segment!
bPlace: www. SP Coast .com | IOB-I2C-MAX731x | 16 bit I2C digital I/O | Go Bears! | www. SP Coast .com | IOB-I2C-MAX731x | 16 bit I2C digital I/O | Go Bears! | www. SP Coast .com | IOB-I2C-MAX731x | 16 bit I2C digital I/O | Go Bears!
_tNames: BOARD | LED16 | R17 | C1 | IC1 | SW3 | SW2 | SW1 | BOARD | LED16 | R17 | C1 | IC1 | SW3 | SW2 | SW1 | BOARD | LED16 | R17 | C1 | IC1 | SW3 | SW2 | SW1
_Name: BOARD | BOARD | BOARD | BOARD | BOARD | BOARD